# EAGLE board 12VConnector_new (EAGLE 9.6.2)
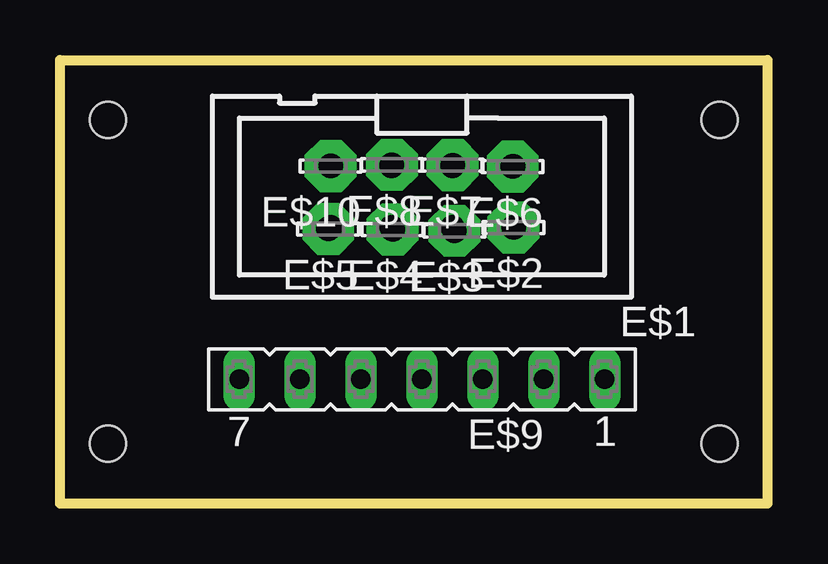
[diagram p0: board, top side]
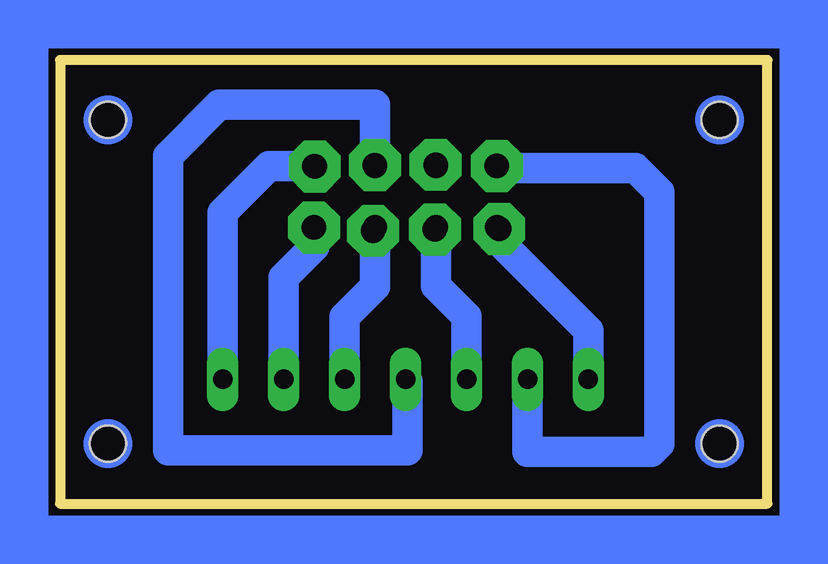
[diagram p1: board, bottom side, seen from below]

Size 29.5 x 18.5 mm. Coordinates in mm from the lower left corner, seen from the top.
Outline: 29.5,18.5 29.5,0 0,0 0,18.5 29.5,18.5
Copper layers (1*16): Top 0.035mm / dielectric 1.5mm / Bottom 0.035mm
Design rules "default": minimum track width 10mil, minimum drill 24mil, track to track 8mil, track to pad 8mil, pad to pad 8mil, via to via 8mil, smd to smd 8mil, copper to edge 40mil, drill to drill 8mil, minimum pad ring 10mil, minimum via ring 8mil, stop-mask expansion 4mil, vias tented up to drill 0mil, thermal gap 10mil
Holes 1.5 mm at 27.5,2.5 2,2.5 2,16 27.5,16

## Footprints (pad centres in the part's own frame; a part is rotated, then mirrored left to right if it is on the bottom)
PAK100/2500-8 = drill 1 pad 1.422: 3 -2.54,-1.27; 4 -2.54,1.27; 5 0,-1.27; 6 0,1.27; 7 2.54,-1.27; 8 2.54,1.27; 9 5.08,-1.27; 10 5.08,1.27
LSP10 = drill 1.016 pad 2.159 octagon: MP 0,0
FE07 = drill 0.813 long: 1 -7.62,0; 2 -5.08,0; 3 -2.54,0; 4 0,0; 5 2.54,0; 6 5.08,0; 7 7.62,0

## Placement (x,y rotation side)
E$1  [PAK100/2500-8]  16.36,12.8 180 top
E$2  [LSP10]  18.91,11.51 180 top
E$3  [LSP10]  16.45,11.37 180 top
E$4  [LSP10]  13.87,11.43 180 top
E$5  [LSP10]  11.19,11.45 180 top
E$6  [LSP10]  18.87,14.06 180 top
E$7  [LSP10]  16.37,14.12 180 top
E$8  [LSP10]  13.84,14.13 180 top
E$9  [FE07]  15.09,5.18 180 top
E$10  [LSP10]  11.29,14.08 180 top

## Library data of the parts
E$1 = con-3m
E$2-E$8 E$10 = solpad
E$9 = con-lsta

## Nets
S$2: E$1.10 E$9.7
S$3: E$1.9 E$9.6
S$4: E$1.8 E$9.5
S$5: E$1.5 E$9.4
S$7: E$1.6 E$9.3
S$9: E$1.4 E$9.2
S$10: E$1.3 E$9.1

## Tracks (layer width: path | path; a pad name or v marks a point on that pad's centre or on a via)
S$2
  Bottom 1.27: E$1.10 11.28,11.03 7.47,7.22 E$9.7
S$3
  Bottom 0.61: E$1.9 11.21,14
  Bottom 1.27: 11.21,14 5.5,14 4.5,13 4.5,2.5 4.84,2.16 10.01,2.16 E$9.6
S$4
  Bottom 1.27: E$1.8 13.82,9.08 12.55,7.81 E$9.5
S$5
  Bottom 0.61: E$9.4 15,5.09
  Bottom 1.27: E$1.5 16.36,16.63 22.87,16.63 25,14.5 25,2.21 15,2.21 15,5.09
S$7
  Bottom 1.27: E$1.6 16.36,9.04 17.63,7.77 E$9.3
S$9
  Bottom 1.27: E$1.4 18.9,10.7 20.17,9.43 E$9.2
S$10
  Bottom 1.27: E$1.3 20.78,14.07 22.71,12.14 E$9.1
(copper drawn outside any net)
  shapes: Bottom area x4, Bottom circle x4

## Text on the board
bTest: B-3 | Bi-6 | R-1 | Vi-5 | M-0v | A-2 | V-4 | 0 | 1 | 2 | 3 | 4 | 5 | 6